# Altium PCB MCU_V2.PcbDoc
Units mil, origin at the board's own origin, x right, y up, seen from the top; angles counter-clockwise.
Board outline 5050 x 1990 mil, 2 copper layers (Top Layer, Bottom Layer); 36 components, 29 nets, 147 pads, 0 vias.
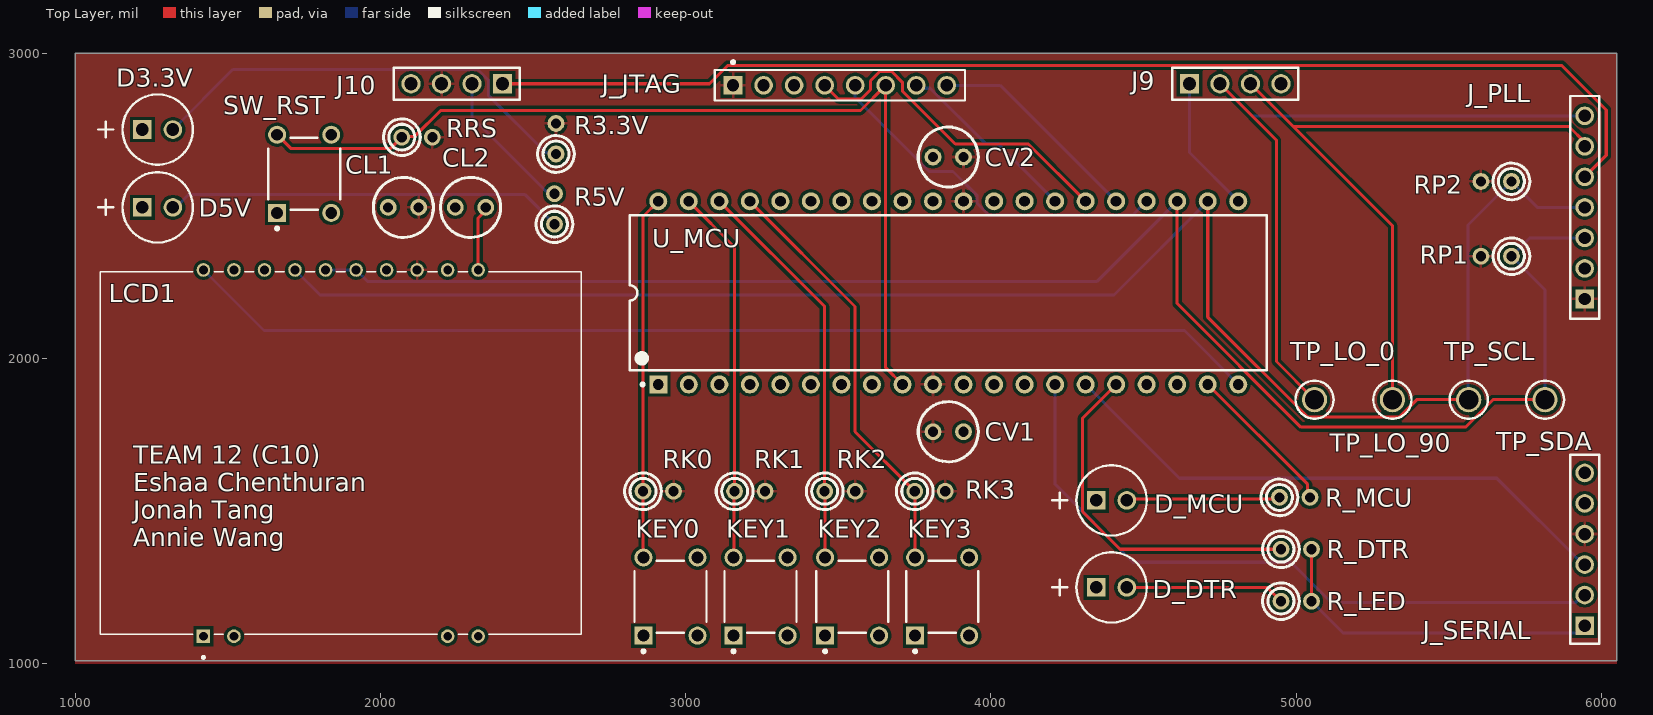
[diagram p0: Top Layer view]
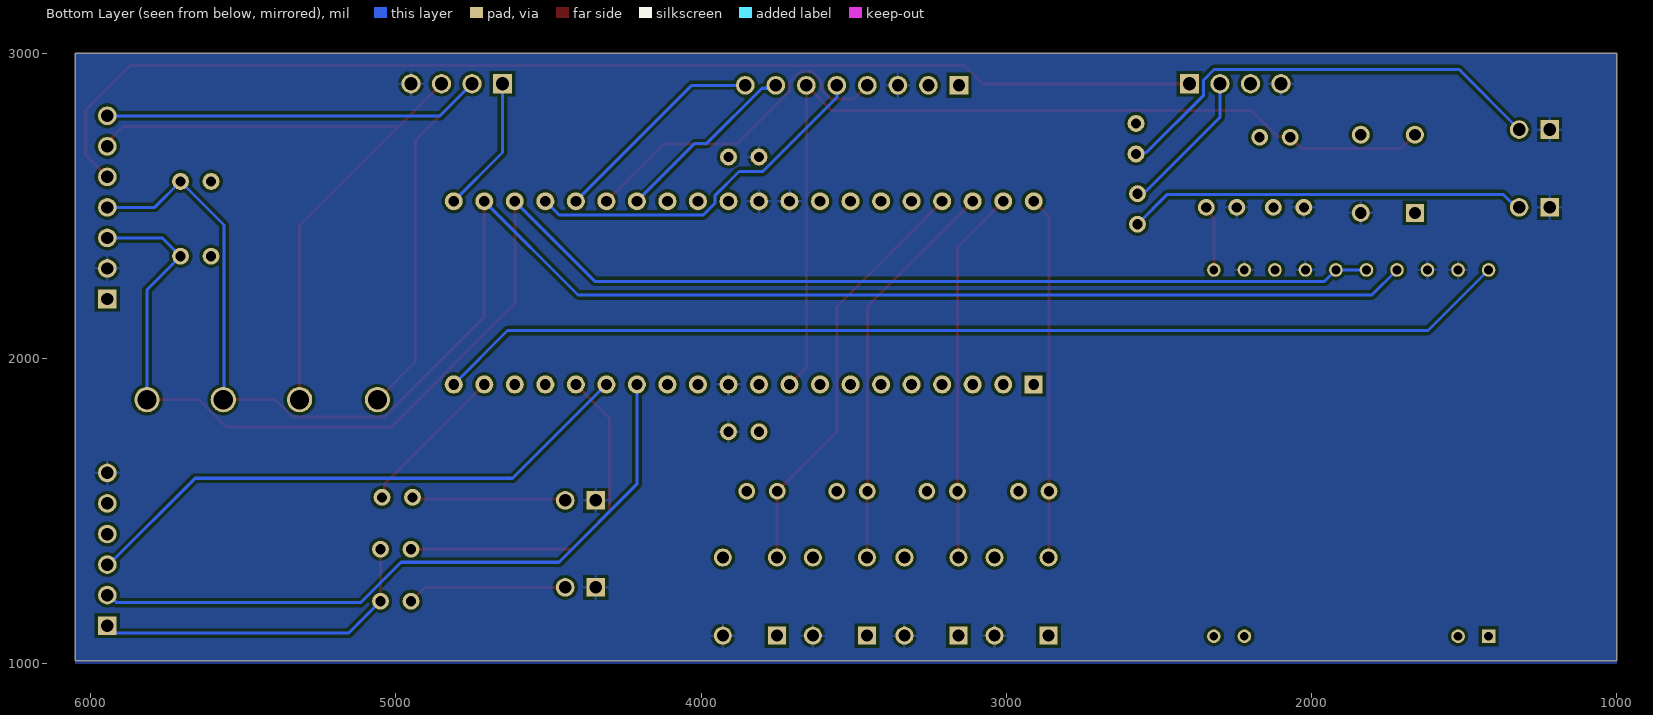
[diagram p1: Bottom Layer view, seen from below]

## Layer stack, top to bottom
Top Solder: solder mask 0.4, Solder Resist, Dk 3.5
Top Layer: signal copper 1.4
Dielectric 1: dielectric 12.6, FR-4, Dk 4.8
Bottom Layer: signal copper 1.4
Bottom Solder: solder mask 0.4, Solder Resist, Dk 3.5

## Board outline
1000,1010 1000,3000 6050,3000 6050,1010

## Design rules (kind name [scope] priority, off if disabled: settings)
Clearance [All] p1: gap=10 ignorepadtopadclearanceinfootprint=FALSE except(0: Arc-Hole Track-Hole SMDPad-Hole THPad-Hole Via-Hole Fill-Hole Poly-Hole Region-Hole Text-Hole)
MinimumSolderMaskSliver [All] p1: minsoldermaskwidth=5
PolygonConnect [All] p1: connectstyle=Relief reliefconductorwidth=10 reliefentries=4 polygonreliefangle="90 Angle" airgapwidth=10
RoutingVias [All] p1: holewidth=28 width=50 viastyle="Through Hole" minholewidth=28 minwidth=50 maxholewidth=28 maxwidth=50
SolderMaskExpansion [All] p1: expansion=4 istentingtop=FALSE
Width [All] p1: maxlimit=10 minlimit=10 preferedwidth=10
29 further rules are at their usual default settings.

## Classes and differential pairs
component class U_Output: 222 CL1 CL2 J_PLL RP1 RP2 TP_LO_0 TP_LO_90 TP_SCL TP_SDA
component class U_Input: D_DTR J_SERIAL KEY0 KEY1 KEY2 KEY3 R_DTR R_LED RK0 RK1 RK2 RK3
component class MCU: CV1 CV2 D3.3V D5V D_MCU J9 J10 J_JTAG R3.3V R5V R_MCU RRS SW_RST U_MCU

## Components (designator, comment, footprint, x,y, rotation, side; value= is the part's Value field where it differs from the comment)
CL1 "Cap" RADIAL-0.1 2075,2495 r0 top value=1UF
CL2 "Cap" RADIAL-0.1 2295,2495 r0 top value=1UF
CV1 "Cap" RADIAL-0.1 3860,1760 r180 top value=0.1UF
CV2 "Cap" RADIAL-0.1 3860,2660 r0 top value=0.1UF
D3.3V "HLMP-3301" AVAG-HLMP-3301-2 1220,2750 r0 top
D5V "HLMP-3301" AVAG-HLMP-3301-2 1220,2495 r0 top
D_DTR "HLMP-3301" AVAG-HLMP-3301-2 4345,1250 r0 top
D_MCU "HLMP-3301" AVAG-HLMP-3301-2 4345,1535 r0 top
J9 "LO_F1" 61300411121 4800,2900 r0 top
J10 "LO_F2" 61300411121 2250,2900 r180 top
J_JTAG "PRPC008SAAN-RC" SLIN-PPPC081LFBN-RC_V 3505,2895 r0 top
J_PLL "PPTC071LFBN-RC" SMTC-SSQ-107-01-X-S 5945,2195 r90 top
J_SERIAL "SSW-106-02-T-S" SMTC-SSW-106-02-X-S 5945,1125 r90 top
KEY0 "1825910-6" TECO-1825910-6_V 2950,1220 r90 top
KEY1 "1825910-6" TECO-1825910-6_V 3245,1220 r90 top
KEY2 "1825910-6" TECO-1825910-6_V 3545,1220 r90 top
KEY3 "1825910-6" TECO-1825910-6_V 3840,1220 r90 top
LCD1 "EA_DOGS164W-A" LCD_EA_DOGS164W-A 1870,1690 r90 top
R3.3V "Res1" AXIAL-0.1-RES 2575,2720 r90 top value=1K
R5V "Res1" AXIAL-0.1-RES 2570,2490 r90 top value=1K
R_DTR "10" AXIAL-0.1-RES 5000,1375 r0 top
R_LED "Res1" AXIAL-0.1-RES 5000,1205 r0 top value=1K
R_MCU "Res1" AXIAL-0.1-RES 4995,1545 r0 top value=1K
RK0 "PULLUP" AXIAL-0.1-RES 2910,1565 r0 top value=10K
RK1 "PULLUP" AXIAL-0.1-RES 3210,1565 r0 top value=10K
RK2 "PULLUP" AXIAL-0.1-RES 3505,1565 r0 top value=10K
RK3 "PULLUP" AXIAL-0.1-RES 3800,1565 r0 top value=10K
RP1 "PULLUP" AXIAL-0.1-RES 5655,2335 r180 top value=1.8K
RP2 "PULLUP" AXIAL-0.1-RES 5655,2580 r180 top value=1.8K
RRS "PULLUP" AXIAL-0.1-RES 2120,2725 r0 top value=10K
SW_RST "1825910-6" TECO-1825910-6_V 1750,2605 r90 top
TP_LO_0 "5010" KSTN-5010_V 5060,1865 r90 top
TP_LO_90 "5011" KSTN-5011_V 5315,1865 r90 top
TP_SCL "5011" KSTN-5011_V 5565,1865 r90 top
TP_SDA "5010" KSTN-5010_V 5815,1865 r90 top
U_MCU "ATmega324A-PU" 40P6 3860,2215 r90 top

## Footprints (in the part's own frame and the unit in brackets; to place one, negate y for a bottom-side part, rotate by r counter-clockwise, add the part's x,y. Pads: shape width x height; smd on the part's side, far side on the other; paste and mask are expansions set on the pad)
40P6 [mm] "40-Pin Ceramic Dual In-Line Package (CerDIP)"
  rect 1.5x1.5 hole 0.9: 1(-7.62,24.13)
  round 1.5 hole 0.9: 2(-7.62,21.59) 3(-7.62,19.05) 4(-7.62,16.51) 5(-7.62,13.97) 6(-7.62,11.43) 7(-7.62,8.89) 8(-7.62,6.35) 9(-7.62,3.81) 10(-7.62,1.27) 11(-7.62,-1.27) 12(-7.62,-3.81) 13(-7.62,-6.35) 14(-7.62,-8.89) 15(-7.62,-11.43) 16(-7.62,-13.97) 17(-7.62,-16.51) 18(-7.62,-19.05) 19(-7.62,-21.59) 20(-7.62,-24.13) 21(7.62,-24.13) 22(7.62,-21.59) 23(7.62,-19.05) 24(7.62,-16.51) 25(7.62,-13.97) 26(7.62,-11.43) 27(7.62,-8.89) 28(7.62,-6.35) 29(7.62,-3.81) 30(7.62,-1.27) 31(7.62,1.27) 32(7.62,3.81) 33(7.62,6.35) 34(7.62,8.89) 35(7.62,11.43) 36(7.62,13.97) 37(7.62,16.51) 38(7.62,19.05) 39(7.62,21.59) 40(7.62,24.13)
  silkscreen extent -7.74,-26.5 6.45,26.5, body extent -7.05,-26.47 7.05,26.47, height 5.72
61300411121 [mm] "Pin Header, pitch 2.54 mm, THT, Vertical, single row, 4p"
  rect 1.6x1.6 hole 1.1: 1(-3.81,0)
  round 1.6 hole 1.1: 2(-1.27,0) 3(1.27,0) 4(3.81,0)
  silkscreen extent -5.23,-1.35 5.23,1.35, body extent -5.08,-1.27 5.08,1.27, height 8.57
AVAG-HLMP-3301-2 [mm] "THD, 2-Leads, Body Dia 5.85mm"
  rect 1.55x1.55 hole 1.05: 1(0,0)
  round 1.55 hole 1.05: 2(2.54,0)
  silkscreen extent -3.68,-2.92 4.19,2.92
AXIAL-0.1-RES [mm] "Axial Device, Thru-Hole; 2 Leads; 0.3 in Pin Spacing"
  round 1.4 hole 0.85: 1(-1.27,0) 2(1.27,0)
  silkscreen extent -2.8,-1.53 0.26,1.53
KSTN-5010_V [mm] "Test Point, Dia 3.17mm"
  round 2.1 hole 1.6: 1(0,0)
  silkscreen extent -1.58,-1.59 1.58,1.59, body extent -1.59,-1.59 1.59,1.59, height 8.13
KSTN-5011_V [mm] "Test Point, Dia 3.17mm"
  round 2.1 hole 1.6: 1(0,0)
  silkscreen extent -1.58,-1.59 1.58,1.59, body extent -1.59,-1.59 1.59,1.59, height 8.13
LCD_EA_DOGS164W-A [mm]
  rect 1.13x1.13 / inner round 1.13 / far side rect 1.13x1.13 hole 0.73: 1(-15.24,11.43)
  round 1.13 hole 0.73: 2(-15.24,8.89) 9(-15.24,-8.89) 10(-15.24,-11.43) 11(15.24,-11.43) 12(15.24,-8.89) 13(15.24,-6.35) 14(15.24,-3.81) 15(15.24,-1.27) 16(15.24,1.27) 17(15.24,3.81) 18(15.24,6.35) 19(15.24,8.89) 20(15.24,11.43)
  silkscreen extent -17.1,-20 15.09,20
RADIAL-0.1 [mm] "Axial Device, Thru-Hole; 2 Leads; 0.3 in Pin Spacing"
  round 1.4 hole 0.85: 1(-1.27,0) 2(1.27,0)
  silkscreen extent -2.5,-2.5 2.5,2.5
SLIN-PPPC081LFBN-RC_V [mm] "THD, 8-Leads, Body 20.82x2.54mm, Pitch 2.54mm"
  rect 1.55x1.55 hole 1.02: 1(-8.89,0)
  round 1.55 hole 1.02: 2(-6.35,0) 3(-3.81,0) 4(-1.27,0) 5(1.27,0) 6(3.81,0) 7(6.35,0) 8(8.89,0)
  silkscreen extent -10.41,-1.27 10.41,2.04, body extent -10.41,-1.27 10.41,1.27, height 8.5
SMTC-SSQ-107-01-X-S [mm] "SQ Post Socket, 1x7 Pins, Vertical, 2.54mm Pitch, Female"
  rect 1.55x1.55 hole 1.02: 1(0,0)
  round 1.55 hole 1.02: 2(2.54,0) 3(5.08,0) 4(7.62,0) 5(10.16,0) 6(12.7,0) 7(15.24,0)
  silkscreen extent -1.65,-1.2 16.89,1.2, body extent -1.52,-1.21 16.76,1.21, height 8.51
SMTC-SSW-106-02-X-S [mm] "SQ Post Socket, 1x6 Pins, Vertical, 2.54mm Pitch, Female"
  rect 1.55x1.55 hole 1.04: 1(0,0)
  round 1.55 hole 1.04: 2(2.54,0) 3(5.08,0) 4(7.62,0) 5(10.16,0) 6(12.7,0)
  silkscreen extent -1.53,-1.2 14.23,1.2, body extent -1.52,-1.21 14.22,1.21, height 8.51
TECO-1825910-6_V [mm] "Switch, 4-Leads, Body 5.99x5.99mm"
  rect 1.5x1.5 hole 0.99: 1(-3.25,2.25)
  round 1.5 hole 0.99: 2(3.25,2.25) 3(-3.25,-2.25) 4(3.25,-2.25)
  silkscreen extent -4.67,-2.99 2.99,3, body extent -3,-2.99 2.99,3, height 5

## Part data
CL1 CL2: library part "CAP ALUM 1UF 20% 100V RADIAL", "Capacitor", Manufacturer Part Number=ESE105M100AC3EA, Voltage Rating=100V, LatestRevisionDate=17-Jul-2002, LatestRevisionNote="Re-released for DXP Platform.", Published=8-Jun-2000, Publisher="Altium Limited"
CV1 CV2: library part "CAP CER 0.1UF 50V X7R RADIAL", "Capacitor", Manufacturer Part Number=K104M15X7RF5TH5, Voltage Rating=50V, LatestRevisionDate=17-Jul-2002, LatestRevisionNote="Re-released for DXP Platform.", Published=8-Jun-2000, Publisher="Altium Limited"
D3.3V D5V D_DTR D_MCU: library part CMP-2000-06411-1, "T-1 3/4 (5 mm) Diffused LED Lamp, 1.9 V, -40 to 100 degC, 2-Pin THD, RoHS, Bulk", Emitting Color=Red, Forward Current=25mA, Forward Voltage=2.4V, Manufacturer=Avago, Operating Temp Range=-40Cto100C, Operating Temperature Classification=Industrial, Package Description="2-Pin Through Hole LED, Dia 5.85 mm", Package Type=T-13/4, Power Dissipation=85W, Reverse Voltage=5V, Test Current (It)=10mA, Chip Material=GaP, Datasheet URL=http://www.avagotech.com/docs/AV02-1558EN, Datasheet Version=03/2015, DELETED=Compliant, Dominant Wave Length=626nm, High Brightness=No, Lens Dimensions=5.08x5.08x8.3mm, Lens Type=ColoredDiffused, Lum Intensity=5.4mcd, Luminous Intensity=5.4mcd, Main Category=StandardLED, Manufacturer URL=http://www.avagotech.com/, Mounting=ThroughHole, Mounting Technology=ThroughHole, Number of  Elements=1, Package Reference=HLMP-3301, Packaging=TapeandReel, Peak Wavelength=635nm, Pin Count=2, Product Depth (mm)=6.1mm, Product Height (mm)=9.19mm, Product Length (mm)=6.1mm, Rad Hardened=No, Shape Type=Circular, Type=Uni-Color, Viewing Angle=60deg
J9 J10: library part CMP-1502-01064-1, "THT Vertical Pin Header WR-PHD, Pitch 2.54 mm, Single Row, 4 pins", Contact Resistance=20mOhm, Manufacturer="Wurth Elektronik", Operating Temperature=-40to105degC, Package Reference=61300411121, Rated Current=3A, Withstanding Voltage=500VAC, Working Voltage=250VAC, Datasheet URL=https://katalog.we-online.de/em/datasheet/6130xx11121.pdf, Gender=Male, Manufacturer URL=http://www.we-online.de, Mounting Technology=THT, Orientation=Vertical, Packaging=Bag, Part Number=61300411121, Pin Number=4, Pitch=2.54mm, Publisher=WurthElektronik, Row Number=Single
J_JTAG: library part CMP-1770-00002-1, "Female Header, Pitch 2.54 mm, 1 x 8 Position, Height 8.5 mm, Tail Length 3.2 mm, -40 to 105 degC, RoHS, Bulk", Case\Package=TO-252-3, Input Capacitance="350 pF", Max Operating Temperature="150 degC", Max Power Dissipation="2.5 W", Min Operating Temperature="-55 degC", Package Quantity=2500, ComponentLink1Description=Datasheet, ComponentLink1URL=http://sullinscorp.com/catalogs/101_PAGE114-115_.100_FEMALE_HDR.pdf, DatasheetVersion=Jan-15, Elements=1, Height="2.39 mm", Length="6.73 mm", Mount="Surface Mount", PackageDescription="Female Header, Pitch 2.54 mm, 1 x 8 Position, Height 8.5 mm, Tail Length 3.2 mm", PackageReference=PPPC081LFBN-RC, Packaging="Tape and Reel", Pins=3, Radiation Hardening=No, Rds On Max="115 mohm", REACH SVHC="No SVHC", RoHSCompliant=true, Typical Rise Time="90 ns", Width="6.22 mm"
J_PLL: library part CMP-1023-00284-1, "SQ Post Socket, Through-hole, Vertical, -55 to 125 degC, 2.54 mm Pitch, 7-Pin, Female, RoHS", Manufacturer=Samtec, PartNumber=SSQ-107-01-G-S, Temperature Range="-55 to 125 degC", ComponentLink1Description="Manufacturer URL", ComponentLink1URL=http://www.samtec.com, ComponentLink2Description=Datasheet, ComponentLink2URL=http://www.samtec.com/documents/webfiles/pdf/SSQ_TH.PDF, ComponentLink3Description="Package Specification", ComponentLink3URL=http://www.samtec.com/documents/webfiles/cpdf/SSQ-1XX-XX-XXX-X-XX-XXX-XX-X-MKT.pdf, DatasheetVersion=F-214, Mounting Technology=Through-hole, Orientation=Vertical, PackageDescription="Assembly, Socket Strip .025[0.64] SQ Tail", PackageReference=SSQ-107-01-X-S, PackageVersion="BD, 6/1987", Pitch="2.54 mm", RoHS=True
J_SERIAL: library part CMP-1023-00360-1, "SQ Post Socket, Through-hole, Vertical, -55 to 105 degC, 2.54mm Pitch, 6-Pin, Female, RoHS", Manufacturer=Samtec, Temperature Range="-55 to 105 degC", ComponentLink1Description="Manufacturer URL", ComponentLink1URL=http://www.samtec.com, ComponentLink2Description=Datasheet, ComponentLink2URL=http://www.samtec.com/documents/webfiles/pdf/SSW_TH.PDF, ComponentLink3Description="Package Specification", ComponentLink3URL=http://www.samtec.com/documents/webfiles/cpdf/SSW-1XX-XX-XXX-X-XX-XXX-XX-MKT.pdf, DatasheetVersion=F-214, Mounting Technology=Through-hole, Orientation=Vertical, PackageDescription="Assembly, Socket Strip .016 X .031 Tail", PackageReference=SSW-106-02-X-S, PackageVersion="CA, 6/1987", PartNumber=SSW-106-02-T-S, Pitch="2.54 mm", RoHS=True
KEY0 KEY1 KEY2 KEY3 SW_RST: library part CMP-1684-00021-1, "Tact Switch, SPST-NO, 0.05 A, -35 to 85 degC, 4-Pin THD, RoHS, Bulk", Actuator Color=Black, Contact Rating @ Voltage=0.05A@24VDC, Dielectric Strength=500VAC, Manufacturer="TE Connectivity", Maximum AC Voltage Rating=N/A, Maximum Contact Resistance=100mOhm, Maximum DC Voltage Rating=24V, Minimum Insulation Resistance=100MOhm, Operating Temperature=-35to85C, Package Description="4-Pin Through Hole Device, Body 5.99 x 5.99 mm, Pitch 6.5 mm", Package Reference=THD, Actuator Length=1.4mm, Actuator Material=PolybutyleneTerephthalate, Actuator Style=RoundButton, Base Material=N/A, Body Orientation=Straight, Bushing Type=Unthreaded, Contact Material=CopperAlloy, Contact Plating=Silver, Datasheet URL=http://www.te.com/commerce/DocumentDelivery/DDEController?Action=showdoc&DocId=Customer+Drawing%7F1825910%7FC9%7Fpdf%7FEnglish%7FENG_CD_1825910_C9.pdf%7F1825910-6, Datasheet Version="Rev. C9", Dimension=5.99x5mm, Electrical Life=100000Cycles, Family=1825910, Function=MomentaryContact, Housing Material=N/A, Illumination=N/R, Manufacturer URL=http://www.te.com, Mechanical Life=100000Cycles, Mounting=ThroughHole, Packaging=N/A, Part No=1825910-6, Pole Throw Configuration=SPST, Product Weight=N/A, RoHS=Yes, Seal Description=N/A, Seal Location=N/A, Switch Configuration=OFF(ON), Terminal Type=PCPins, Thread Size=N/R
LCD1: "Character LCD Display Module Transflective 5 x 32 Dots FSTN - Film Super-Twisted Nematic Without Backlight IÂ²C, SPI 40.00mm x 33.00mm x 2.60mm", Package=None, Availability="In Stock", Check_prices=https://www.snapeda.com/parts/EA%20DOGS164W-A/Focus+Display+Solutions/view-part/?ref=eda, MF="Display Visions", MP="EA DOGS164W-A", Price=None, Purchase-URL="https://pricing.snapeda.com/search/part/EA DOGS164W-A/?ref=eda", SnapEDA_Link=https://www.snapeda.com/parts/EA%20DOGS164W-A/Focus+Display+Solutions/view-part/?ref=snap
R3.3V R5V R_LED R_MCU: library part "RES 1K OHM 5% 1/4W AXIAL", "Resistor", Manufacturer Part Number=CFR-25JB-52-1K, Power Rating=1/4W, Tolerance=0.05, LatestRevisionDate=17-Jul-2002, LatestRevisionNote="Re-released for DXP Platform.", Published=8-Jun-2000, Publisher="Altium Limited"
R_DTR: library part "RES 10 OHM 5% 1/4W AXIAL", "Resistor", Manufacturer Part Number=CFR-25JB-52-10R, Power Rating=1/4W, Tolerance=0.05, LatestRevisionDate=17-Jul-2002, LatestRevisionNote="Re-released for DXP Platform.", Published=8-Jun-2000, Publisher="Altium Limited"
RK0 RK1 RK2 RK3 RRS: library part "RES 10K OHM 5% 1/4W AXIAL", "Resistor", Manufacturer Part Number=CFR-25JB-52-10K, Power Rating=1/4W, Tolerance=0.05, LatestRevisionDate=17-Jul-2002, LatestRevisionNote="Re-released for DXP Platform.", Published=8-Jun-2000, Publisher="Altium Limited"
RP1 RP2: library part "RES 1.8K OHM 5% 1/4W AXIAL", "Resistor", Manufacturer Part Number=CFR-25JB-52-1K8, Power Rating=1/4W, Tolerance=0.05, LatestRevisionDate=17-Jul-2002, LatestRevisionNote="Re-released for DXP Platform.", Published=8-Jun-2000, Publisher="Altium Limited"
TP_LO_0 TP_SDA: library part CMP-1672-00002-4, "Test Point, Red, Through Hole, RoHS, Bulk", Colour=Red, Manufacturer=Keystone, Package Quantity=100, ComponentLink1Description="Manufacturer URL", ComponentLink1URL=http://www.keyelco.com/, ComponentLink2Description=Datasheet, ComponentLink2URL=http://www.keyelco.com/product-pdf.cfm?p=1319, Contact Material=Bronze, Contact Plating=Silver, DatasheetVersion="Rev. F, 12/2013", Height="8.12 mm", Mount="Through Hole", Mounting Technology="Through Hole", PackageDescription="1-Pin Through Hole Device, Dia 3.17 mm", PackageReference=5010, Packaging=Bulk, Pins=1, REACH SVHC="No SVHC", RoHSCompliant=true
TP_LO_90 TP_SCL: library part CMP-1672-00003-4, "Test Point, Black, Through Hole, RoHS, Bulk", Colour=Black, Manufacturer=Keystone, Package Quantity=100, ComponentLink1Description="Manufacturer URL", ComponentLink1URL=http://www.keyelco.com/, ComponentLink2Description=Datasheet, ComponentLink2URL=http://www.keyelco.com/product-pdf.cfm?p=1320, Contact Material=Bronze, Contact Plating=Silver, DatasheetVersion="Rev. F, 12/2013", Height="8.12 mm", Mount="Through Hole", Mounting Technology="Through Hole", PackageDescription="1-Pin Through Hole Device, Dia 3.17 mm", PackageReference=5011, Packaging=Bulk, Pins=1, REACH SVHC="No SVHC", RoHSCompliant=true
U_MCU: library part CMP-0095-00016-2, "8-bit AVR Microcontroller, 32KB Flash, 1KB EEPROM, 2KB SRAM, 40-pin PDIP, Industrial Grade (-40°C to 85°C)", Code_JEDEC=MS-011-AC, ComponentLink1Description="Manufacturer URL", ComponentLink1URL=http://www.atmel.com/, ComponentLink2Description="ATmega164A/164PA/324A/324PA/644A/644PA/1284/1284P Datasheet", ComponentLink2URL=http://www.atmel.com/dyn/resources/prod_documents/doc8272.pdf, ComponentLink3Description="ATmega164A/164PA/324A/324PA/644A/644PA/1284/1284P Summary", ComponentLink3URL=http://www.atmel.com/dyn/resources/prod_documents/8272S.pdf, DatasheetVersion="revC, Jun-2011", PackageDescription="40-lead (0.600\"/15.24mm Wide) Plastic Dual Inline Package (PDIP)", PackageReference=40P6, PackageVersion="revB, Sep-2001", RevisionNote="DatasheetVersion & Sch pin names updated. URLs added."

## Nets (pads, with @x,y where several pads share a name; then routed paths per layer and width w, separated by ;. In a path a pad name is that pad's centre, name@x,y a point inside that pad or via, vN(x,y) a via of type N, cw(c..) or ccw(c..) an arc to the next point about the centre after c; other vN are vias at no path point)
+3.3V: CL1.2 CV1.2 CV2.2 J10.3 J_JTAG.1 J_PLL.1 J_SERIAL.4 LCD1.13 R3.3V.2 RK0.2 RK1.2 RK2.2 RK3.2 RP1.2 RP2.2 RRS.2 U_MCU.10 U_MCU.30
+5V: J10.2 R5V.2 | length 483.6
  Bottom Layer w10: J10.2 2300,2790 2541.37,2548.63 2561.37,2548.63 R5V.2
/TXEN: J9.1 U_MCU.21 | length 451.3
  Bottom Layer w10: J9.1 4650,2675 U_MCU.21
DTR: R_DTR.1 U_MCU.16 | length 1164.1
  Top Layer w10: U_MCU.16 4299.49,1804.49 4299.49,1498.28 4422.76,1375 R_DTR.1
GND: CL1.1 CL2.1 CV1.1 CV2.1 D3.3V.1 D5V.1 D_DTR.1 D_MCU.1 J9.4 J10.4 J_JTAG.3 J_PLL.2 J_SERIAL.6 KEY0.3 KEY1.3 KEY2.3 KEY3.3 LCD1.12 LCD1.14 LCD1.18 LCD1.19 SW_RST.3 U_MCU.11 U_MCU.31 U_MCU.32
GPIO_TEST: R_MCU.2 U_MCU.19 | length 508.8
  Top Layer w10: U_MCU.19 5037.44,1587.56 5037.44,1552.56 R_MCU.2
LO_F1_0: J9.2 J_PLL.7 TP_LO_0.1 | length 2401.9
  Top Layer w10: J9.2 4935,2715 4935,1990 TP_LO_0.1
  Bottom Layer w10: J9.2 4855,2795 J_PLL.7
LO_F1_90: J9.3 J_PLL.6 TP_LO_90.1 | length 2217.6
  Top Layer w10: J9.3 4990,2760 ; TP_LO_90.1 5315,2435 4990,2760 ; J_PLL.6 5945,2708.81 5893.81,2760 4990,2760
LO_F2: J10.1 J_PLL.5 | length 3949.4
  Top Layer w10: J10.1 3077.76,2900 3138.28,2960.51 5868.85,2960.51 6015.51,2813.85 6015.51,2665.51 J_PLL.5
NetCL2_2: CL2.2 LCD1.11 | length 215.4
  Top Layer w10: LCD1.11 2320,2460 2345,2485 CL2.2
NetD3.3V_2: D3.3V.2 R3.3V.1 | length 1480.2
  Bottom Layer w10: D3.3V.2 1516.5,2946.5 2319.26,2946.5 2353.5,2912.25 2353.5,2862.29 2540.3,2675.49 2569.51,2675.49 R3.3V.1
NetD5V_2: D5V.2 R5V.1 | length 1308
  Bottom Layer w10: D5V.2 1330,2495 1372.56,2537.56 2472.44,2537.56 R5V.1
NetD_DTR_2: D_DTR.2 R_LED.1 | length 523.6
  Top Layer w10: D_DTR.2 4905,1250 R_LED.1
NetD_MCU_2: D_MCU.2 R_MCU.1 | length 504.1
  Top Layer w10: D_MCU.2 4450,1540 4940,1540 R_MCU.1
NetJ_SERIAL_1: J_SERIAL.1 R_DTR.2 R_LED.2 | length 1118.8
  Top Layer w10: R_LED.2 R_DTR.2
  Bottom Layer w10: R_LED.2 5155,1100 5920,1100 J_SERIAL.1
PA0: KEY0.2 RK0.1 U_MCU.40 | length 1188.1
  Top Layer w10: RK0.1 2860,2465 U_MCU.40 ; RK0.1@2860.71,1565 2860.71,1348.66 KEY0.2
PA1: KEY1.2 RK1.1 U_MCU.39 | length 1231.7
  Top Layer w10: U_MCU.39 3160,2365 RK1.1 3158.21,1565 3158.21,1349.74 KEY1.2
PA2: KEY2.2 RK2.1 U_MCU.38 | length 1310.2
  Top Layer w10: U_MCU.38 3455,2170 RK2.1 ; RK2.1@3455.71,1565 3455.71,1348.66 KEY2.2
PA3: KEY3.2 RK3.1 U_MCU.37 | length 1391
  Top Layer w10: U_MCU.37 3554.53,2170.47 3554.53,1760.47 RK3.1 ; RK3.1@3750.71,1565 3750.71,1348.66 KEY3.2
RST: J_JTAG.6 RRS.1 SW_RST.2 U_MCU.9 | length 3100.4
  Top Layer w10: SW_RST.2 1705.94,2688.43 2033.42,2688.43 2072.75,2727.75 2112.56,2727.75 2197.37,2812.56 3572.56,2812.56 J_JTAG.6 3655,1970 U_MCU.9
RST_LED: LCD1.20 U_MCU.20 | length 3545.3
  Bottom Layer w10: LCD1.20 1618.61,2091.39 4633.61,2091.39 U_MCU.20
RXD: J_SERIAL.3 U_MCU.15 | length 1879.4
  Bottom Layer w10: U_MCU.15 4617.31,1607.69 5657.31,1607.69 5940,1325 J_SERIAL.3
SCL: J_PLL.4 LCD1.17 RP2.1 TP_SCL.1 U_MCU.22 | length 5594.7
  Top Layer w10: U_MCU.22 4710,2135.33 5036.66,1808.66 5338.34,1808.66 5394.67,1865 TP_SCL.1
  Bottom Layer w10: LCD1.17 1802.24,2207.76 4402.76,2207.76 U_MCU.22 ; TP_SCL.1 5562.44,1867.56 5562.44,2437.44 RP2.1 5789.81,2495.19 J_PLL.4@5944.81,2495.19
SDA: J_PLL.3 LCD1.15 LCD1.16 RP1.1 TP_SDA.1 U_MCU.23 | length 5458.3
  Top Layer w10: U_MCU.23 4610,2180 5015,1775 5554.67,1775 5644.67,1865 TP_SDA.1
  Bottom Layer w10: LCD1.16 LCD1.15 ; LCD1.15@1920,2271.17 LCD1.15 ; U_MCU.23 4347.76,2252.76 1957.24,2252.76 LCD1.15 ; TP_SDA.1 5815,2225 RP1.1 5765,2395 J_PLL.3
TCK: J_JTAG.5 U_MCU.24 | length 1188
  Bottom Layer w10: J_JTAG.5 3555,2854.81 3797.42,2612.39 3875.58,2612.39 3954.53,2533.44 3954.53,2507.5 3991.56,2470.47 4465.47,2470.47 U_MCU.24
TDI: J_JTAG.7 U_MCU.27 | length 612.4
  Bottom Layer w10: J_JTAG.7 3764.76,2885.24 3800.4,2885.24 3980.82,2704.81 4020.19,2704.81 U_MCU.27
TDO: J_JTAG.4 U_MCU.26 | length 1121.5
  Top Layer w10: J_JTAG.4 3500.51,2849.49 3573.85,2849.49 3605,2880.64 3605,2909.36 3636.15,2940.51 3673.85,2940.51 3709.49,2904.88 3709.49,2876.15 3883.08,2702.56 4122.44,2702.56 U_MCU.26
TMS: J_JTAG.8 U_MCU.25 | length 712.4
  Bottom Layer w10: J_JTAG.8 4030,2895 U_MCU.25
TXD: J_SERIAL.2 U_MCU.14 | length 2233.2
  Bottom Layer w10: U_MCU.14 4210,1587.76 4465.32,1332.44 4982.75,1332.44 5115.19,1200 5913.92,1200 5938.92,1225 J_SERIAL.2
pads on no net: J_JTAG.2 J_SERIAL.5 KEY0.1 KEY0.4 KEY1.1 KEY1.4 KEY2.1 KEY2.4 KEY3.1 KEY3.4 LCD1.1 LCD1.2 LCD1.9 LCD1.10 SW_RST.1 SW_RST.4 U_MCU.1 U_MCU.2 U_MCU.3 U_MCU.4 U_MCU.5 U_MCU.6 U_MCU.7 U_MCU.8 U_MCU.12 U_MCU.13 U_MCU.17 U_MCU.18 U_MCU.28 U_MCU.29 U_MCU.33 U_MCU.34 U_MCU.35 U_MCU.36

## Polygon pours and split planes (outlines as drawn)
+3.3V on Top Layer "+3.3V" (solid, pour order 0): 1000,3000 6050,3000 6050,1000 1000,1000
GND on Bottom Layer "GND" (solid, pour order 1): 1000,3000 6050,3000 6050,1000 1000,1000

## Silkscreen, mask and mechanical layers (free items; w line width, h text height)
Top Overlay:
  text "TEAM 12 (C10) / Eshaa Chenthuran / Jonah Tang / Annie Wang" at 1190,1385 h60
Board Shape:
  lines w47.24: 1025,1035 6025,1035 6025,2975 1025,2975 1025,1035